# EAGLE board SDCardv1 (EAGLE 6.0)
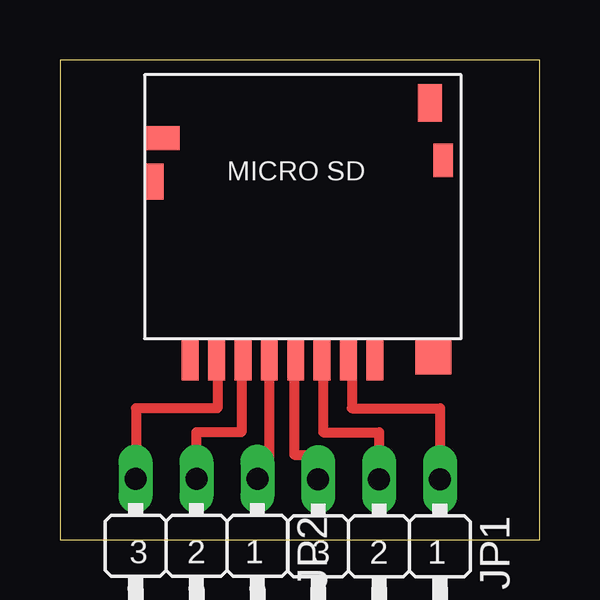
[diagram p0: board, top side]

Size 20 x 20 mm. Coordinates in mm from the lower left corner, seen from the top.
Outline: 0,0 20,0 20,20 0,20 0,0
Copper layers (1*16): Top 0.035mm / dielectric 1.5mm / Bottom 0.035mm
Design rules: minimum track width 10mil, minimum drill 24mil, track to track 8mil, track to pad 8mil, pad to pad 8mil, via to via 8mil, smd to smd 8mil, copper to edge 40mil, drill to drill 8mil, minimum pad ring 10mil, minimum via ring 8mil, stop-mask expansion 4mil, vias tented up to drill 0mil, thermal gap 10mil

## Footprints (pad centres in the part's own frame; a part is rotated, then mirrored left to right if it is on the bottom)
JP2W = drill 0.914 long: 1 -2.54,-1.27; 2 0,-1.27; 3 2.54,-1.27
MICROSD_SOCKET = smd 1.45 x 1: CD -5.875,1.75 | smd 1 x 1.55: CD2 5.3,3.225 | smd 0.7 x 1.75: CLK -1.4,-7.475; CS 1.9,-7.475; DI 0.8,-7.475; DO -3.6,-7.475; NC 3,-7.475; RSV -4.7,-7.475; VDD -0.3,-7.475; VSS -2.5,-7.475 | smd 1.5 x 1.5: MOUNT2 5.45,-7.35 | smd 0.8 x 1.5: MOUNT3 -6.2,-0.05 | smd 0.8 x 1.4: MOUNT4 5.85,0.825

## Placement (x,y rotation side)
JP1  [JP2W]  13.3,1.24 180 top
JP2  [JP2W]  5.7,1.26 180 top
U$1  MICROSD_SOCKET  [MICROSD_SOCKET]  10.13,14.98 0 top

## Library data of the parts
JP1 JP2 = jumper
U$1 = ekohub2013

## Nets
N$1: JP1.1 U$1.CS
N$2: JP1.2 U$1.DI
N$3: JP1.3 U$1.VDD
N$4: JP2.1 U$1.CLK
N$5: JP2.2 U$1.VSS
N$6: JP2.3 U$1.DO

## Tracks (layer width: path | path; a pad name or v marks a point on that pad's centre or on a via)
N$1
  Top 0.406: U$1.CS 12.17,7.5 12.17,5.47 15.85,5.47 JP1.1
N$2
  Top 0.406: U$1.DI 10.97,7.5 10.97,4.47 13.3,4.47 JP1.2
N$3
  Top 0.406: U$1.VDD 9.77,7.5 9.77,3.54 10.77,3.54 JP1.3
N$4
  Top 0.406: JP2.1 8.73,2.52 U$1.CLK
N$5
  Top 0.406: U$1.VSS 7.57,7.5 7.57,4.47 5.68,4.47 JP2.2
N$6
  Top 0.406: U$1.DO 6.57,7.5 6.57,5.47 3.17,5.47 3.17,3.55 | JP2.3 3.17,3.55 | 3.17,3.55 3.17,3.54